# Altium PCB pcb.PCBDOC (part 2 of 4)
Units mil, origin at the board's own origin, x right, y up, seen from the top; angles counter-clockwise.
Board outline 6250 x 3000 mil, 6 copper layers (Top Layer, Internal Plane 1, Mid-Layer 1, Mid-Layer 2, Internal Plane 2, Bottom Layer); 189 components, 357 nets, 1696 pads, 997 vias.
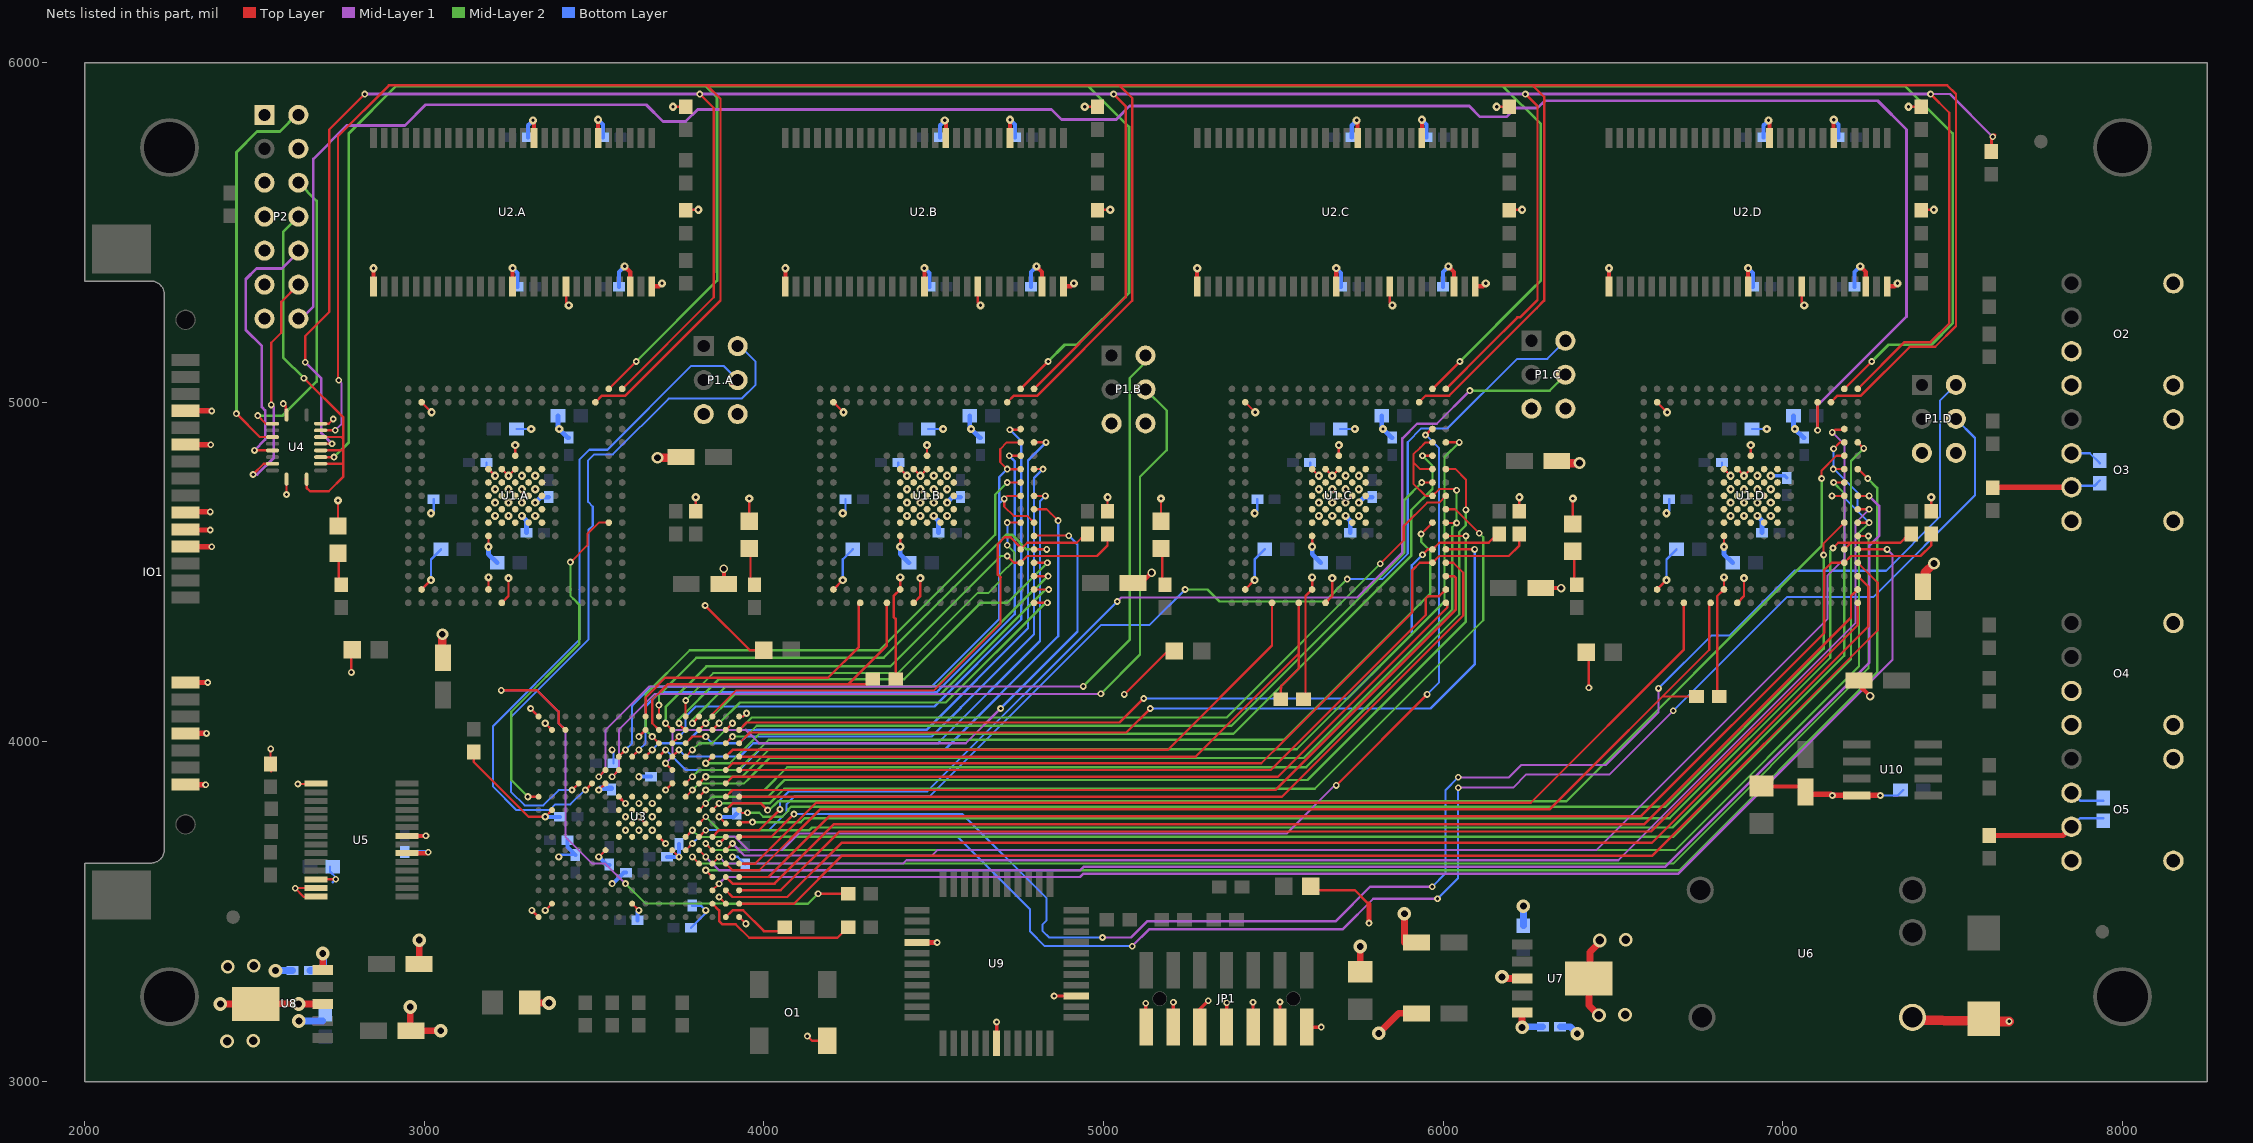
[diagram p6: the nets of this part, all layers, seen from the top]

## Via types
v1: diameter 24, hole 10, Top Layer to Bottom Layer, tented top, 281 vias
v2: diameter 24, hole 10, Top Layer to Bottom Layer, 250 vias
v3: diameter 20, hole 10, Top Layer to Bottom Layer, 211 vias
v4: diameter 21.2, hole 10, Top Layer to Bottom Layer, tented top, 109 vias
v5: diameter 20, hole 10, Top Layer to Bottom Layer, tented top, 96 vias
v6: diameter 40, hole 20, Top Layer to Bottom Layer, 25 vias
v7: diameter 25, hole 15, Top Layer to Bottom Layer, 9 vias
v8: diameter 35, hole 20, Top Layer to Bottom Layer, 8 vias
v9: diameter 40, hole 25, Top Layer to Bottom Layer, 8 vias

## Nets (pads, with @x,y where several pads share a name; then routed paths per layer and width w, separated by ;. In a path a pad name is that pad's centre, name@x,y a point inside that pad or via, vN(x,y) a via of type N, cw(c..) or ccw(c..) an arc to the next point about the centre after c; other vN are vias at no path point) (continued)
DSPA_TFS1: U1.A.G2 U3.G1 | length 1021.1
  Top Layer w6: v5@3428.15,4526.57 3480.32,4578.74 3480.32,4612.2 3513.78,4645.67 U1.A.G2@3543.31,4645.67
  Top Layer w7: v4(3305.12,3838.58) U3.G1@3336.61,3838.58
  Mid-Layer 2 w6: v5(3430.12,4529.53) 3430.12,4430.12 3438.98,4421.26
  Mid-Layer 2 w7: v4(3305.12,3838.58) 3255.91,3887.8 3255.91,4088.58 3456.69,4289.37 3456.69,4403.54 3438.98,4421.26
DSPA_UARTRX: P1.A.4 U3.F5 | length 2019.2
  Top Layer w7: v3(3474.41,3858.27) U3.F5@3494.09,3877.95
  Bottom Layer w6: v3(3474.41,3858.27) 3472.44,3858.27 3430.12,3815.94 3385.83,3815.94 3369.09,3799.21 3271.65,3799.21 3201.77,3869.09 3201.77,4045.28 3456.69,4300.2 3456.69,4830.71 3486.22,4860.24 3539.37,4860.24 3786.42,5107.28 3880.91,5107.28 P1.A.4@3922.83,5065.35
DSPA_UARTTX: P1.A.2 U3.F4 | length 2048.6
  Top Layer w7: v3(3435.04,3858.27) U3.F4@3454.72,3877.95
  Bottom Layer w6: v3(3435.04,3858.27) 3395.67,3858.27 3350.39,3812.99 3295.28,3812.99 3255.91,3852.36 3255.91,4073.82 3483.27,4301.18 3483.27,4624.02 3496.06,4636.81 3496.06,4692.91 3482.28,4706.69 3482.28,4828.74 3500,4846.46 3555.12,4846.46 3719.49,5010.83 3934.06,5010.83 3975.39,5052.17 3975.39,5119.09 P1.A.2@3924.21,5170.28
DSPB_CLK: U1.B.A14 U3.A9 | length 879.5
  Top Layer w7: U3.A9@3651.58,4074.8 3651.57,4129.92 3686.02,4164.37 ; 3685.04,4165.35 3708.66,4188.98 4188.98,4188.98 4279.53,4279.53 U1.B.A14@4279.53,4413.39
DSPB_DR0PRI: U1.B.M2 U3.D8 | length 1869.6
  Top Layer w7: U3.D8@3612.2,3956.69 v4(3631.89,3976.38) ; v5(4722.44,4842.52) U1.B.M2@4755.9,4842.52
  Bottom Layer w6: v4(3631.89,3976.38) 3651.57,3996.06 3651.57,4104.33
  Bottom Layer w7: 3651.57,4104.33 3692.91,4145.67 4507.87,4145.67 4514.75,4152.54 4738.19,4375.98 4738.19,4826.77 v5(4722.44,4842.52)
DSPB_DR1PRI: U1.B.H1 U3.D10 | length 1796.2
  Top Layer w6: U1.B.H1@4795.28,4685.04 4832.68,4685.04 4844.49,4673.23 v5(4866.14,4651.57)
  Top Layer w7: U3.D10@3690.95,3956.69 v4(3710.63,3976.38)
  Bottom Layer w6: v4(3710.63,3976.38) 3769.69,3917.32 3927.17,3917.32
  Bottom Layer w7: 3927.17,3917.32 3986.22,3976.38 4531.5,3976.38 4866.14,4311.02 v5(4866.14,4651.57)
DSPB_DT1PRI: U1.B.F1 U3.E11 | length 1870.5
  Top Layer w6: U1.B.F1@4794.29,4607.28 v3(4897.64,4607.28)
  Top Layer w7: v4(3710.63,3937.01) U3.E11@3730.32,3917.32
  Mid-Layer 1 w6: v4(3710.63,3937.01) 3730.32,3956.69 3730.32,4025.59 3740.16,4035.43 3946.85,4035.43
  Mid-Layer 1 w7: 3946.85,4035.43 3986.22,3996.06 4594.49,3996.06 v3(4696.85,4098.43)
  Bottom Layer w7: v3(4696.85,4098.43) 4923.23,4324.8 4923.23,4581.69 v3(4897.64,4607.28)
DSPB_DTOPRI: U1.B.K2 U3.C10 | length 1592
  Top Layer w7: v4(3671.26,4015.75) U3.C10@3690.95,3996.06 ; v5(4716.53,4763.78) U1.B.K2@4755.9,4763.78
  Mid-Layer 2 w7: v4(3671.26,4015.75) 3651.57,4035.43 3651.57,4139.76 3781.5,4269.69 4340.55,4269.69 4681.1,4610.24 4681.1,4728.35 v5(4716.53,4763.78)
DSPB_FLAG0: U1.B.C1 U3.A13 | length 1307.5
  Top Layer w7: v4(3789.37,4055.12) U3.A13@3809.06,4074.8 ; U1.B.C1@4795.28,4488.19 v5(4836.61,4488.19)
  Mid-Layer 2 w7: v4(3789.37,4055.12) 3789.37,4064.96 3887.8,4163.39 4509.84,4163.39 4795.28,4448.82 4797.24,4448.82 v5(4836.61,4488.19) v5@4830.71,4488.19
DSPB_FLAG1: U1.B.B1 U3.B13 | length 1244.1
  Top Layer w7: U3.B13@3809.06,4035.43 v4(3828.74,4055.12) ; U1.B.B1@4795.28,4448.82 4828.74,4448.82 v5(4838.58,4448.82)
  Mid-Layer 2 w7: v4(3828.74,4055.12) 3913.39,4139.76 4519.69,4139.76 4828.74,4448.82 v5(4838.58,4448.82)
DSPB_FLAG4: U1.B.A1 U3.B14 | length 1180.5
  Top Layer w7: U3.B14@3848.43,4035.43 v4(3868.11,4055.12) ; U1.B.A1@4795.28,4409.45 v5(4834.65,4409.45)
  Mid-Layer 2 w7: v4(3868.11,4055.12) 3929.13,4116.14 4535.43,4116.14 4554.94,4135.65 4808.04,4388.75 4828.74,4409.45 v5(4834.65,4409.45)
DSPB_FS1: U1.B.P2 U3.C11 | length 1806.7
  Top Layer w6: U3.C11@3730.32,3996.06 v5(3750,4015.75)
  Top Layer w7: v5(4724.41,4919.29) 4753.94,4919.29 U1.B.P2@4755.9,4921.26
  Bottom Layer w6: v5(3750,4015.75) 3769.68,4035.43 3769.68,4074.8 3799.21,4104.33 4000,4104.33
  Bottom Layer w7: 4000,4104.33 4501.97,4104.33 4757.87,4360.24 4757.87,4885.83 v5(4724.41,4919.29)
DSPB_MISO: R1.B.1 U1.B.E2 U3.A14 | length 1506
  Top Layer w6: U3.A14@3848.43,4074.8 3848.43,4081.69 3918.31,4151.57 4500.98,4151.57 4696.85,4347.44 4696.85,4486.22
  Top Layer w7: 4696.85,4484.25 4688.98,4492.13 4688.98,4582.68 4708.66,4602.36 4726.38,4602.36 4755.9,4572.84 U1.B.E2@4755.9,4566.93 4775.59,4586.61 4921.26,4586.61 R1.B.1@4944.88,4610.24
DSPB_MOSI: U1.B.E1 U3.A10 | length 1455.8
  Top Layer w7: U3.A10@3690.95,4074.8 v5(3690.94,4108.27) ; U1.B.E1@4795.28,4566.93 v5(4832.68,4566.93)
  Mid-Layer 2 w7: v5(3690.94,4108.27) 3690.94,4137.8 3801.18,4248.03 4352.36,4248.03 4688.41,4584.08 4714.57,4610.24 4730.31,4610.24 4773.62,4566.93 v5(4832.68,4566.93)
DSPB_RESET: R34.B.1 U1.B.A12 U3.B10 | length 1059.1
  Top Layer w7: U3.B10@3690.95,4035.43 3671.26,4055.12 3671.26,4124.02 3716.54,4169.29 4305.12,4169.29 R34.B.1@4320.87,4185.04 ; 4248.03,4169.29 4362.2,4283.46 U1.B.A12@4362.2,4409.45
DSPB_RFS0: U1.B.N1 U3.D9 | length 1887.2
  Top Layer w7: U3.D9@3651.58,3956.69 v4(3671.26,3976.38) ; U1.B.N1@4795.28,4881.89 v5(4830.71,4881.89)
  Bottom Layer w6: v4(3671.26,3976.38) 3690.94,3996.06 3769.68,3996.06 ; 3809.06,4035.43 3978.35,4035.43
  Bottom Layer w7: 3769.68,3996.06 3809.06,4035.43 ; 3978.35,4035.43 4478.35,4035.43 4777.56,4334.65 4777.56,4828.74 v5(4830.71,4881.89)
DSPB_RFS1: U1.B.J1 U3.D11 | length 1707.2
  Top Layer w6: U1.B.J1@4795.28,4724.41 v5(4828.74,4724.41)
  Top Layer w7: U3.D11@3730.32,3956.69 v4(3750,3976.38)
  Bottom Layer w6: v4(3750,3976.38) 3769.69,3956.69 3929.13,3956.69
  Bottom Layer w7: 3929.13,3956.69 3968.5,3996.06 4511.81,3996.06 4812.99,4297.24 4812.99,4708.66 v5(4828.74,4724.41)
DSPB_SCK: U1.B.D1 U3.B12 | length 1357.2
  Top Layer w7: v4@3748.03,4055.12 3767.72,4035.43 U3.B12@3769.69,4035.43 ; U1.B.D1@4795.28,4527.56 v5(4834.65,4527.56)
  Mid-Layer 2 w7: v4@3748.03,4055.12 3748.03,4064.96 3868.11,4185.04 4413.39,4185.04 4637.8,4409.45 4716.54,4409.45 v5(4834.65,4527.56)
  other v4: 3750,4055.12
DSPB_SCLK: U1.B.G1 U1.B.J2 U1.B.L2 U1.B.N2 U3.D7 | length 2181.1
  Top Layer w6: v5(4716.53,4803.15) 4695.87,4823.82 4695.87,4862.2 4715.55,4881.89 U1.B.N2@4755.9,4881.89 ; U1.B.J2@4755.9,4724.41 4716.53,4724.41 v5(4707.68,4715.55) 4707.68,4692.91 4735.24,4665.35 4775.59,4665.35 U1.B.G1@4795.28,4645.67
  Top Layer w7: U3.D7@3572.83,3956.69 v4(3592.52,3976.38) ; v5(4716.53,4803.15) U1.B.L2@4755.9,4803.15
  Bottom Layer w6: v4(3592.52,3976.38) 3612.2,3996.06 3612.2,4106.3 ; 4692.91,4700.79 v5(4707.68,4715.55)
  Bottom Layer w7: 3612.2,4106.3 3668.22,4162.31 4493.02,4162.31 4692.91,4362.2 4692.91,4779.53 v5(4716.53,4803.15)
DSPB_SS: R7.B.2 U1.B.D2 U3.B11 | length 1623.4
  Top Layer w7: v4(3710.63,4055.12) U3.B11@3730.32,4035.43 ; v5(4716.54,4547.24) 4736.22,4527.56 U1.B.D2@4755.9,4527.56 4775.59,4547.24 4980.32,4547.24 5011.81,4578.74 R7.B.2@5011.81,4612.2
  Mid-Layer 2 w6: 4688.98,4539.37 4696.85,4547.24 v5(4716.54,4547.24)
  Mid-Layer 2 w7: v4(3710.63,4055.12) 3710.63,4102.36 3830.71,4222.44 4372.05,4222.44 4688.98,4539.37
DSPB_TFS0: U1.B.L1 U3.C12 | length 1714.3
  Top Layer w6: U1.B.L1@4795.28,4803.15 v5(4821.85,4803.15)
  Top Layer w7: U3.C12@3769.69,3996.06 3789.37,4015.75 v4(3828.74,4015.75)
  Bottom Layer w6: v4(3828.74,4015.75) 3848.43,3996.06 3927.17,3996.06
  Bottom Layer w7: 3927.17,3996.06 3946.85,4015.75 4494.09,4015.75 4579.9,4101.56 ; 4568.81,4090.47 4795.28,4316.93 4795.28,4776.57 v5(4821.85,4803.15)
DSPB_TFS1: U1.B.G2 U3.A12 | length 1357.1
  Top Layer w6: U3.A12@3769.69,4074.8 v3(3769.69,4122.05) ; v5(4716.54,4645.67) U1.B.G2@4755.9,4645.67
  Mid-Layer 2 w6: v3(3769.69,4122.05) 3850.39,4202.76 4393.7,4202.76 4629.92,4438.98 4661.42,4438.98 4694.88,4472.44 4694.88,4492.13 4738.15,4535.4 4738.15,4557.12 v5(4716.54,4578.74)
  Bottom Layer w6: v5(4716.54,4578.74) v5(4716.54,4645.67)
DSPB_UARTRX: P1.B.4 U3.E7 | length 2639.3
  Top Layer w6: v3(3553.15,3897.64) U3.E7@3572.83,3917.32
  Mid-Layer 1 w6: v3(3553.15,3897.64) 3572.83,3917.32 3572.83,4035.43 3679.13,4141.73 v3(4992.13,4141.73)
  Mid-Layer 2 w7: v3(4992.13,4141.73) 5107.28,4256.89 5107.28,4780.51 5186.02,4859.25 5186.02,4975.39 P1.B.4@5123.62,5037.8
DSPB_UARTTX: P1.B.2 U3.E6 | length 2683.2
  Top Layer w6: v3(3513.78,3897.64) U3.E6@3533.46,3917.32
  Mid-Layer 1 w6: v3(3513.78,3897.64) 3533.46,3917.32 3533.46,4034.45 3662.4,4163.39 v3(4939.96,4163.39)
  Mid-Layer 2 w7: v3(4939.96,4163.39) 5076.77,4300.2 5076.77,5070.87 5123.62,5117.72 P1.B.2@5123.62,5137.8
DSPC_CLK: U1.C.A14 U3.D15 | length 1869
  Top Layer w7: U3.D15@3887.8,3956.69 3907.48,3976.38 5188.98,3976.38 5496.06,4283.46 U1.C.A14@5496.06,4407.48 ; U1.C.A14@5495.08,4408.46 U1.C.A14@5496.06,4409.45
DSPC_DR0PRI: U1.C.M2 U3.D14 | length 2724.4
  Top Layer w7: v4@3826.77,3937.01 v4(3828.74,3937.01) U3.D14@3848.43,3956.69 ; v5(5938.98,4842.52) U1.C.M2@5968.5,4842.52
  Mid-Layer 2 w7: v4@3826.77,3937.01 3899.61,3937.01 3986.22,4023.62 5381.89,4023.62 5905.51,4547.24 5905.51,4682.09 5968.5,4745.08 5968.5,4812.99 v5(5938.98,4842.52)
DSPC_DR1PRI: U1.C.H1 U3.H14 | length 2889.8
  Top Layer w6: U3.H14@3848.43,3799.21 v5(3868.11,3818.9) ; U1.C.H1@6007.87,4685.04 6035.43,4685.04 v3(6106.3,4614.17)
  Mid-Layer 2 w7: v5(3868.11,3818.9) 4016.73,3818.9 4060.04,3862.2 5622.05,3862.2 6118.11,4358.27 6118.11,4602.36 v3(6106.3,4614.17)
DSPC_DT1PRI: U1.C.F1 U3.H13 | length 2804.4
  Top Layer w6: U3.H13@3809.06,3799.21 v5(3828.74,3818.9) ; U1.C.F1@6007.87,4606.3 v5(6066.93,4606.3)
  Mid-Layer 1 w6: v5(6066.93,4606.3) v5@6070.87,4610.24
  Mid-Layer 2 w6: v5(3828.74,3818.9) 3848.43,3838.58 4011.81,3838.58
  Mid-Layer 2 w7: 4011.81,3838.58 4061.02,3887.8 5600.39,3887.8 6066.93,4354.33 v5(6066.93,4606.3)
DSPC_DTOPRI: U1.C.K2 U3.C15 | length 2489.8
  Top Layer w7: U3.C15@3887.8,3996.06 v4(3907.48,4015.75) ; v5(5937.01,4763.78) U1.C.K2@5968.5,4763.78
  Mid-Layer 2 w6: v4(3907.48,4015.75) 3946.85,4015.75 3978.35,4047.24
  Mid-Layer 2 w7: 3978.35,4047.24 5375.98,4047.24 5885.83,4557.09 5885.83,4712.6 v5(5937.01,4763.78)
DSPC_FLAG0: U1.C.C1 U3.G15 | length 2502.4
  Top Layer w7: U3.G15@3887.8,3838.58 3907.48,3858.27 5505.91,3858.27 6037.4,4389.76 6037.4,4482.28 6031.5,4488.19 U1.C.C1@6007.87,4488.19
DSPC_FLAG1: U1.C.B1 U3.E16 | length 2328.5
  Top Layer w7: U3.E16@3927.17,3917.32 5492.13,3917.32 5948.82,4374.02 5948.82,4421.26 5956.69,4429.13 5988.19,4429.13 U1.C.B1@6007.87,4448.82
DSPC_FLAG4: U1.C.A1 U3.F15 | length 2353.9
  Top Layer w7: U3.F15@3887.8,3877.95 3907.48,3897.64 5513.78,3897.64 6011.81,4395.67 6011.81,4405.51 U1.C.A1@6007.87,4409.45
DSPC_FS1: U1.C.P2 U3.K15 | length 3151.8
  Top Layer w7: v5(3868.11,3700.79) U3.K15@3887.8,3720.47 ; v3(5685.04,3872.05) v3(5952.76,4139.76) ; v3(5947.83,4903.54) 5965.55,4921.26 U1.C.P2@5969.49,4921.26
  Mid-Layer 1 w6: v5(3868.11,3700.79) 3888.3,3720.98 3914.84,3720.98 3954.72,3681.1 4053.15,3681.1 4102.36,3730.32 5539.37,3730.32 5681.1,3872.05 v3(5685.04,3872.05)
  Bottom Layer w6: v3@5948.33,4904.03 5988.19,4864.17 5988.19,4175.2 v3(5952.76,4139.76)
DSPC_MISO: R1.C.1 U1.C.E2 U3.B16 | length 2587.2
  Top Layer w7: U3.B16@3927.17,4035.43 3948.82,4057.09 5047.24,4057.09 v3(5118.11,4127.95) ; v5(5938.98,4551.18) 5954.72,4566.93 U1.C.E2@5968.5,4566.93 5988.19,4586.61 6133.86,4586.61 R1.C.1@6157.48,4610.24
  Bottom Layer w7: v3(5118.11,4127.95) 5718.5,4127.95 5907.48,4316.93 5907.48,4519.69 v5(5938.98,4551.18)
DSPC_MOSI: U1.C.E1 U3.C16 | length 2686.8
  Top Layer w7: U3.C16@3927.17,3996.06 3958.66,4027.56 5066.93,4027.56 v3(5137.8,4098.43) ; U1.C.E1@6005.91,4566.93 v3(6092.52,4566.93)
  Bottom Layer w7: v3(5137.8,4098.43) 5962.6,4098.43 6092.52,4228.35 v3(6092.52,4566.93)
DSPC_RESET: R34.C.1 U1.C.A12 U3.D16 | length 2078.7
  Top Layer w7: U3.D16@3927.17,3956.69 5271.65,3956.69 5574.8,4259.84 ; R34.C.1@5521.65,4125.98 5521.65,4157.48 5523.62,4159.45 5523.62,4165.35 5574.8,4216.53 U1.C.A12@5574.8,4409.45
DSPC_RFS0: U1.C.N1 U3.F13 | length 2942.5
  Top Layer w7: U3.F13@3809.06,3877.95 v4(3828.74,3897.64) ; U1.C.N1@6007.87,4881.89 v5(6047.24,4881.89)
  Mid-Layer 2 w7: v4(3828.74,3897.64) 3935.04,3897.64 4015.75,3978.35 5568.9,3978.35 6003.94,4413.39 6003.94,4838.58 v5(6047.24,4881.89)
DSPC_RFS1: U1.C.J1 U3.D12 | length 2581
  Top Layer w6: U3.D12@3769.69,3956.69 v5(3789.37,3976.38) ; v5(5814.96,4524.61) 5883.86,4593.5 5883.86,4635.83 5952.76,4704.72 5988.19,4704.72 U1.C.J1@6007.87,4724.41
  Mid-Layer 2 w6: v5(3789.37,3976.38) 3809.05,3996.06 3848.43,3996.06 3887.8,4035.43 3928.15,4035.43 3964.57,4071.85 5362.2,4071.85 v5(5814.96,4524.61)
DSPC_SCK: U1.C.D1 U3.G16 | length 2542.3
  Top Layer w7: U3.G16@3927.17,3838.58 5525.59,3838.58 6059.06,4372.05 6059.06,4498.03 6029.53,4527.56 U1.C.D1@6007.87,4527.56
DSPC_SCLK: U1.C.G1 U1.C.J2 U1.C.L2 U1.C.N2 U3.G12 | length 3246.4
  Top Layer w6: U3.G12@3769.69,3838.58 v5(3789.37,3858.27) ; 5912.4,4823.82 5933.07,4803.15 U1.C.L2@5968.5,4803.15 ; U1.C.N2@5968.5,4881.89 5947.83,4881.89 5932.09,4866.14 5912.4,4846.46 5912.4,4759.84 5947.84,4724.41 U1.C.J2@5968.5,4724.41 5988.19,4744.09 6036.42,4744.09 v5(6039.37,4741.14) ; U1.C.G1@6007.87,4644.69 v5(6039.37,4644.69)
  Mid-Layer 2 w6: v5(3789.37,3858.27) 3809.05,3877.95 3941.93,3877.95 3954.84,3890.86 ; v5(6039.37,4644.69) v5(6039.37,4741.14)
  Mid-Layer 2 w7: 3954.84,3890.86 4016.73,3952.76 5589.57,3952.76 6026.57,4389.76 6026.57,4631.89 v5(6039.37,4644.69)
DSPC_SS: R7.C.2 U1.C.D2 U3.E15 | length 2716.7
  Top Layer w7: U3.E15@3887.8,3917.32 3907.48,3937.01 5464.57,3937.01 5529.53,4001.97 5909.45,4381.89 5909.45,4505.91 5931.1,4527.56 U1.C.D2@5968.5,4527.56 5988.19,4547.24 6192.91,4547.24 6224.41,4578.74 R7.C.2@6224.41,4612.2
DSPC_TFS0: U1.C.L1 U3.G13 | length 2937.3
  Top Layer w6: U1.C.L1@6007.87,4803.15 6036.42,4803.15 6066.93,4772.64 v5(6066.93,4683.07)
  Top Layer w7: U3.G13@3809.06,3838.58 v4(3828.74,3858.27)
  Mid-Layer 2 w7: v4(3828.74,3858.27) 4001.97,3858.27 4068.9,3925.2 5596.46,3925.2 5641.33,3970.07 6047.24,4375.98 6047.24,4618.11 6066.93,4637.8 v5(6066.93,4683.07)
DSPC_TFS1: U1.C.G2 U3.F12 | length 2657.6
  Top Layer w6: U3.F12@3769.69,3877.95 v5(3789.37,3897.64) ; v5(5935.04,4612.2) U1.C.G2@5968.5,4645.67
  Mid-Layer 2 w6: v5(3789.37,3897.64) 3809.06,3917.32 3924.21,3917.32 4013.78,4006.89
  Mid-Layer 2 w7: 4013.78,4006.89 5532.48,4006.89 5961.61,4436.02 5961.61,4562.99 5935.04,4589.57 v5(5935.04,4612.2)
DSPC_UARTRX: P1.C.4 U3.K14 | length 3287.6
  Top Layer w7: U3.K14@3848.43,3720.47 3868.11,3740.16 3986.22,3740.16 v3(4047.24,3801.18)
  Mid-Layer 1 w7: v3(5040.35,4413.39) 5052.17,4425.2 5747.05,4425.2 5879.92,4558.07 5879.92,4893.7 5923.23,4937.01 5981.3,4937.01 v3(6078.74,5034.45)
  Mid-Layer 2 w7: v3(6078.74,5034.45) 6313.98,5034.45 6359.84,5080.31 P1.C.4@6359.84,5081.1
  Bottom Layer w6: v3(4047.24,3801.18) 4047.24,3827.76 4073.82,3854.33 4481.3,3854.33 v3(5040.35,4413.39)
DSPC_UARTTX: P1.C.2 U3.K13 | length 3392.1
  Top Layer w7: U3.K13@3809.06,3720.47 v3(3828.74,3740.16) ; v3(5240.16,4448.82) v3@5241.14,4448.82
  Mid-Layer 2 w7: v3@5241.14,4448.82 5306.1,4448.82 5341.54,4413.39 5651.57,4413.39 v3(5717.52,4479.33)
  Bottom Layer w6: v3(3828.74,3740.16) 4014.76,3740.16 4066.93,3792.32 4066.93,3816.93 4088.58,3838.58 4487.2,3838.58 4993.11,4344.49 5135.83,4344.49 v3(5240.16,4448.82) ; v3(5717.52,4479.33) 5820.87,4479.33 5895.67,4554.13 5895.67,4882.87 5936.02,4923.23 6012.8,4923.23 6217.52,5127.95 6306.69,5127.95 P1.C.2@6359.84,5181.1
DSPD_CLK: U1.D.A14 U3.M16 | length 3180.2
  Top Layer w7: U3.M16@3927.17,3641.73 3974.41,3641.73 4153.54,3820.87 6257.87,3820.87 6708.66,4271.65 U1.D.A14@6708.66,4409.45
DSPD_DR0PRI: U1.D.M2 U3.H15 | length 3877.8
  Top Layer w6: v5(7114.17,4775.59) 7114.17,4799.21 7157.48,4842.52 U1.D.M2@7181.1,4842.52
  Top Layer w7: U3.H15@3887.8,3799.21 3907.48,3818.9 3991.14,3818.9 v3(4010.83,3799.21)
  Mid-Layer 2 w7: v3@4007.87,3799.21 4015.75,3799.21 4041.34,3824.8 6362.2,3824.8 7114.17,4576.77 v5(7114.17,4775.59) ; v3(4010.83,3799.21) v3@4012.8,3801.18
DSPD_DR1PRI: U1.D.H1 U3.M14 | length 4060.4
  Top Layer w6: U3.M14@3848.43,3641.73 v5(3868.11,3661.42) ; U1.D.H1@7220.47,4685.04 v5(7253.94,4685.04)
  Mid-Layer 1 w6: v5(3868.11,3661.42) 3887.8,3641.73 4409.45,3641.73 4419.29,3651.57 6515.75,3651.57 7214.57,4350.39 7214.57,4645.67 v5(7253.94,4685.04)
DSPD_DT1PRI: U1.D.F1 U3.M13 | length 4157.9
  Top Layer w6: v5(3789.37,3661.42) U3.M13@3809.06,3641.73
  Top Layer w7: U1.D.F1@7220.47,4606.3 v5(7251.97,4606.3)
  Mid-Layer 2 w6: v5(3789.37,3661.42) 3809.05,3641.73 6677.17,3641.73 7251.97,4216.53 v5(7251.97,4606.3)
DSPD_DTOPRI: U1.D.K2 U3.J13 | length 4163.7
  Top Layer w6: v5(7149.61,4763.78) U1.D.K2@7181.1,4763.78
  Top Layer w7: U3.J13@3809.06,3759.84 v3(3828.74,3779.53)
  Mid-Layer 2 w7: v3(3828.74,3779.53) 3868.11,3740.16 4133.86,3740.16 4141.73,3748.03 6675.2,3748.03 7181.1,4253.94 7181.1,4732.28 v5(7149.61,4763.78)
DSPD_FLAG0: U1.D.C1 U3.P15 | length 3863.2
  Top Layer w7: U3.P15@3887.8,3562.99 3907.48,3543.31 4068.9,3543.31 4228.35,3702.76 6614.17,3702.76 7251.97,4340.55 7251.97,4456.69 U1.D.C1@7220.47,4488.19
DSPD_FLAG1: U1.D.B1 U3.N15 | length 3736.5
  Top Layer w7: U3.N15@3887.8,3602.36 3907.48,3582.68 4031.5,3582.68 4206.69,3757.87 6592.52,3757.87 7200.79,4366.14 7200.79,4429.13 U1.D.B1@7220.47,4448.82
DSPD_FLAG4: U1.D.A1 U3.P16 | length 3682
  Top Layer w7: U3.P16@3927.17,3562.99 4049.21,3562.99 4222.44,3736.22 6612.2,3736.22 7220.47,4344.49 U1.D.A1@7220.47,4409.45
DSPD_FS1: U1.D.P2 U3.L15 | length 4178.5
  Top Layer w7: U3.L15@3887.8,3681.1 v5(3907.48,3700.79) ; v5(7145.67,4911.42) 7153.54,4919.29 U1.D.P2@7181.1,4919.29
  Mid-Layer 1 w6: v5(3907.48,3700.79) 3942.91,3665.35 4494.09,3665.35 4509.84,3681.1 6450.79,3681.1 7131.89,4362.2 7131.89,4490.16 7181.1,4539.37 7181.1,4875.98 v5(7145.67,4911.42)
DSPD_MISO: R1.D.1 U1.D.E2 U3.J16 | length 4007.5
  Top Layer w7: U3.J16@3927.17,3759.84 3931.1,3763.78 v5(3966.54,3763.78) ; v5(7147.64,4570.87) 7163.39,4586.61 7346.46,4586.61 R1.D.1@7370.08,4610.24 ; U1.D.E2@7181.1,4566.93 7200.79,4586.61
  Mid-Layer 2 w7: v5(3966.54,3763.78) 4108.27,3763.78 4120.08,3775.59 6667.32,3775.59 7139.76,4248.03 7139.76,4562.99 v5(7147.64,4570.87)
DSPD_MOSI: U1.D.E1 U3.P14 | length 4173.7
  Top Layer w6: U3.P14@3848.43,3562.99 v5(3868.11,3582.68)
  Top Layer w7: U1.D.E1@7220.47,4566.93 v3(7307.09,4566.93)
  Mid-Layer 1 w7: v5(3868.11,3582.68) 3887.8,3602.36 4931.1,3602.36 4940.94,3612.2 6692.91,3612.2 7322.83,4242.13 7322.83,4551.18 v3(7307.09,4566.93)
DSPD_RESET: R34.D.1 U1.D.A12 U3.M15 | length 3412.7
  Top Layer w7: U3.M15@3887.8,3641.73 3907.48,3622.05 3986.22,3622.05 4165.35,3801.18 6312.99,3801.18 6783.28,4271.47 6783.28,4405.33 U1.D.A12@6787.4,4409.45 ; 6645.67,4133.86 R34.D.1@6746.06,4133.86
DSPD_RFS0: U1.D.N1 U3.K12 | length 4324.9
  Top Layer w7: U3.K12@3769.69,3720.47 v4(3789.37,3740.16) ; U1.D.N1@7220.47,4881.89 v5(7238.19,4864.17)
  Mid-Layer 2 w6: v4(3789.37,3740.16) 3809.06,3720.47 4049.21,3720.47
  Mid-Layer 2 w7: 4049.21,3720.47 6677.17,3720.47 7200.79,4244.09 7200.79,4826.77 v5(7238.19,4864.17)
DSPD_RFS1: U1.D.J1 U3.L13 | length 4272.2
  Top Layer w6: U3.L13@3809.06,3681.1 v5(3828.74,3661.42) ; U1.D.J1@7220.47,4724.41 v5(7253.94,4724.41)
  Mid-Layer 1 w7: v5(3828.74,3661.42) 3868.11,3622.05 4931.1,3622.05 4940.94,3631.89 6653.54,3631.89 7253.94,4232.28 7253.94,4576.77 7283.46,4606.3 7283.46,4694.88 v5(7253.94,4724.41)
DSPD_SCK: U1.D.D1 U3.R16 | length 3909.1
  Top Layer w7: U3.R16@3927.17,3523.62 4088.58,3523.62 4230.31,3665.35 6616.14,3665.35 7279.53,4328.74 7279.53,4468.5 U1.D.D1@7220.47,4527.56
DSPD_SCLK: U1.D.G1 U1.D.J2 U1.D.L2 U1.D.N2 U3.L14 | length 4592.2
  Top Layer w6: v5(3828.74,3700.79) U3.L14@3848.43,3681.1 ; v5(7144.69,4724.41) U1.D.J2@7181.1,4724.41 ; v5(7148.62,4803.15) U1.D.L2@7181.1,4803.15 ; v5(7149.61,4863.19) 7168.31,4881.89 U1.D.N2@7181.1,4881.89 U1.D.N2@7185.04,4881.89
  Top Layer w7: U1.D.G1@7220.47,4645.67 v5(7253.94,4645.67)
  Mid-Layer 2 w6: v5(3828.74,3700.79) 3848.43,3681.1 6683.07,3681.1 7224.41,4222.44 7224.41,4616.14 v5(7253.94,4645.67)
  Bottom Layer w6: v5(7144.69,4724.41) 7175.2,4724.41 v5(7253.94,4645.67) ; v5(7149.61,4863.19) 7149.61,4804.13 7220.47,4733.27 7220.47,4679.13
DSPD_SS: R7.D.2 U1.D.D2 U3.N16 | length 4056.1
  Top Layer w7: U3.N16@3927.17,3602.36 4013.78,3602.36 4192.91,3781.5 6582.68,3781.5 7122.05,4320.87 7122.05,4505.91 7143.7,4527.56 U1.D.D2@7181.1,4527.56 7200.79,4547.24 7405.51,4547.24 7437.01,4578.74 R7.D.2@7437.01,4612.2
DSPD_TFS0: U1.D.L1 U3.N14 | length 4342.1
  Top Layer w6: v4(3828.74,3622.05) U3.N14@3848.43,3602.36
  Top Layer w7: U1.D.L1@7220.47,4805.12 v5(7250,4775.59)
  Mid-Layer 2 w7: v4(3828.74,3622.05) 6694.88,3622.05 7277.56,4204.72 7277.56,4748.03 v5(7250,4775.59)
DSPD_TFS1: U1.D.G2 U3.H16 | length 3804.7
  Top Layer w6: U3.H16@3927.17,3799.21 3935.04,3791.34 v3(3951.77,3791.34) ; v5(7120.08,4550.2) 7120.08,4584.65 U1.D.G2@7181.1,4645.67
  Mid-Layer 2 w7: v3(3951.77,3791.34) 3986.22,3791.34 3998.03,3779.53 4053.96,3779.53 4071.85,3797.42 4071.85,3801.18 4079.72,3809.06 6654.53,3809.06 7120.08,4274.61 v5(7120.08,4550.2)
DSPD_UARTRX: P1.D.4 U3.L12 | length 4937.8
  Top Layer w7: U3.L12@3769.69,3681.1 v3(3789.37,3700.79)
  Mid-Layer 1 w6: v3(6044.29,3865.16) 6205.71,3865.16 6245.08,3904.53 6490.16,3904.53 v3(6677.17,4091.54)
  Mid-Layer 1 w7: v3(5084.65,3398.62) 5134.84,3448.82 5704.72,3448.82 5794.29,3538.39 v3(5983.27,3538.39)
  Bottom Layer w6: v3(3789.37,3700.79) 3809.06,3720.47 4569.88,3720.47 4783.46,3506.89 4783.46,3441.93 4826.77,3398.62 v3(5084.65,3398.62) ; v3(5983.27,3538.39) 6044.29,3599.41 v3(6044.29,3865.16) ; v3(6677.17,4091.54) 7011.81,4426.18 7265.75,4426.18 7565.94,4726.38 7565.94,4894.69 P1.D.4@7509.45,4951.18
DSPD_UARTTX: P1.D.2 U3.K16 | length 4892.4
  Top Layer w7: U3.K16@3927.17,3720.47 4021.65,3720.47 v3(4088.58,3787.4)
  Mid-Layer 1 w6: v3(6044.29,3895.67) 6193.9,3895.67 6230.31,3932.09 6478.35,3932.09 6633.86,4087.6 v3(6633.86,4157.48)
  Mid-Layer 1 w7: v3(4997.05,3424.21) 5080.71,3424.21 5128.94,3472.44 5684.06,3472.44 5785.43,3573.82 v3(5967.52,3573.82)
  Bottom Layer w6: v3(4088.58,3787.4) 4584.65,3787.4 4832.68,3539.37 4832.68,3474.41 4820.87,3462.6 4820.87,3442.91 4839.57,3424.21 v3(4997.05,3424.21) ; v3(5967.52,3573.82) 6006.89,3613.19 6006.89,3858.27 v3(6044.29,3895.67) ; v3(6633.86,4157.48) 6790.35,4313.98 6844.49,4313.98 7034.45,4503.94 7304.13,4503.94 7462.6,4662.4 7462.6,5004.33 P1.D.2@7509.45,5051.18
DSPE\M\U\: P2.2 U4.4 | length 1132.9
  Top Layer w7: v3(2446.85,4966.54) 2515.75,4897.64 U4.4@2553.15,4897.64
  Mid-Layer 2 w8: v3(2446.85,4966.54) 2446.85,5736.22 2507.87,5797.24 2574.8,5797.24 2624.02,5846.46 P2.2@2629.53,5846.46
DSPE\M\U\BUF: R35.1 U1.A.U1 U1.B.U1 U1.C.U1 U1.D.U1 U4.16 | length 10130.6
  Top Layer w7: v3(2649.43,5117.94) 2649.43,5194.71 2720.47,5265.75 2720.47,5803.15 v3(2824.8,5907.48) ; U4.16@2694.88,4877.95 v3(2728.35,4877.95) ; U1.A.U1@3582.68,5039.37 3852.36,5309.06 3852.36,5866.14 v3(3811.02,5907.48) ; U1.B.U1@4795.28,5039.37 5064.96,5309.06 5064.96,5872.05 v3(5029.53,5907.48) ; U1.C.U1@6007.87,5039.37 6134.18,5165.68 6218.5,5250 6226.38,5250 6277.56,5301.18 6277.56,5872.05 v3(6242.13,5907.48) ; U1.D.U1@7220.47,5039.37 7358.27,5177.17 7435.04,5177.17 7490.16,5232.28 7490.16,5852.36 v3(7435.04,5907.48)
  Top Layer w9: R35.1@7614.17,5738.19 7614.17,5777.56 v3@7624.02,5787.4
  Mid-Layer 1 w6: 2710.46,4895.84 v3(2728.35,4877.95)
  Mid-Layer 1 w7: v3(7435.04,5907.48) 7492.13,5907.48 v3(7618.11,5781.5)
  Mid-Layer 1 w8: v3(2649.43,5117.94) 2696.85,5070.52 2696.85,4909.45 v3(2728.35,4877.95) ; v3(2824.8,5907.48) v3(7435.04,5907.48)
DSPT\R\S\T\: P2.10 U4.6 | length 790.9
  Top Layer w7: v3(2500,4858.27) U4.6@2555.12,4858.27
  Mid-Layer 1 w8: v3@2498.03,4860.24 v3(2500,4858.27) 2531.5,4889.76 2531.5,4976.38 2521.65,4986.22 2521.65,5165.35 2474.41,5212.6 2474.41,5362.2 2505.91,5393.7 2580.71,5393.7 2629.53,5442.52 P2.10@2629.53,5446.46
DSPT\R\S\T\BUF: U1.A.U2 U1.B.U2 U1.C.U2 U1.D.U2 U4.14 | length 10007.1
  Top Layer w7: U4.14@2696.85,4838.58 v3(2734.25,4838.58) ; U1.A.U2@3543.31,5039.37 v3(3624.02,5120.08) ; U1.B.U2@4755.9,5039.37 v3(4836.61,5120.08) ; U1.C.U2@5968.5,5039.37 v3(6049.21,5120.08) ; U1.D.U2@7181.1,5039.37 v5(7261.81,5120.08)
  Mid-Layer 2 w7: v3(3624.02,5120.08) 3862.2,5358.27 3862.2,5382.87
  Mid-Layer 2 w8: v3(2734.25,4838.58) 2777.56,4881.89 2777.56,5791.34 2917.32,5931.1 7360.24,5931.1 7500,5791.34 7500,5232.28 7437.01,5169.29 7311.02,5169.29 v5(7261.81,5120.08) ; 3828.74,5931.1 3862.2,5897.64 3862.2,5382.87 ; v3(4836.61,5120.08) 4885.83,5169.29 4922.24,5169.29 5074.8,5321.85 5074.8,5811.02 4954.72,5931.1 ; v3(6049.21,5120.08) 6260.83,5331.69 6287.4,5358.27 6287.4,5818.9 6175.2,5931.1
DSPTCK: P2.8 U4.11 U4.13 U4.15 U4.17 | length 1216.9
  Top Layer w7: v3(2645.67,5070.87) 2761.81,4954.72 2761.81,4781.5 2718.5,4738.19 2663.39,4738.19 2653.54,4748.03 U4.11@2653.54,4773.62 ; U4.11@2651.57,4773.62 U4.11@2653.54,4771.65 ; U4.13@2694.88,4818.9 2759.84,4818.9 ; U4.15@2694.88,4858.27 2761.81,4858.27 ; U4.17@2694.88,4897.64 2755.91,4897.64 2761.81,4891.73
  Mid-Layer 2 w8: P2.8@2629.53,5546.46 2584.65,5501.57 2584.65,5131.89 v3(2645.67,5070.87)
DSPTDI: P2.12 U4.8 | length 697.9
  Top Layer w7: v3(2496.06,4787.4) 2527.56,4818.9 U4.8@2553.15,4818.9 ; v3(2549.21,4992.13) 2549.21,5175.2 2578.74,5204.72 2578.74,5295.67 P2.12@2629.53,5346.46
  Mid-Layer 1 w8: v3(2496.06,4787.4) 2507.87,4787.4 2557.09,4836.61 2557.09,4984.25 v3(2549.21,4992.13)
DSPTDO: P2.14 U1.D.T4 | length 6457.9
  Top Layer w7: v5(7102.36,4917.32) U1.D.T4@7102.36,5000
  Mid-Layer 1 w8: P2.14@2629.53,5246.46 P2.14@2631.5,5246.46 ; P2.14@2633.86,5242.13 2673.23,5281.5 2673.23,5716.54 2771.65,5814.96 2942.91,5814.96 3003.94,5875.98 3653.54,5875.98 3702.76,5826.77 3769.69,5826.77 3805.12,5862.2 4846.46,5862.2 4875.98,5832.68 5037.4,5832.68 5076.77,5872.05 6076.77,5872.05 6108.27,5840.55 6187.01,5840.55 6212.6,5866.14 6277.56,5866.14 6299.21,5887.8 7279.53,5887.8 7364.17,5803.15 7364.17,5251.97 7102.36,4990.16 v5(7102.36,4917.32)
DSPTMS: P2.6 U4.2 | length 875.5
  Top Layer w7: v3(2509.84,4960.63) 2533.46,4937.01 U4.2@2553.15,4937.01
  Mid-Layer 2 w8: v3(2509.84,4960.63) 2582.68,4960.63 2683.07,5061.02 2683.07,5592.91 P2.6@2629.53,5646.46
DSPTMSBUF: U1.A.T3 U1.B.T3 U1.C.T3 U1.D.T3 U4.18 | length 10321.9
  Top Layer w7: U4.18@2694.88,4917.32 v3(2738.19,4917.32) ; v3@2746.06,5066.93 2746.06,5783.46 2895.67,5933.07 7484.25,5933.07 7509.84,5907.48 7509.84,5224.41 7448.82,5163.39 7374.02,5163.39 7230.31,5019.69 7161.42,5019.69 U1.D.T3@7141.73,5000 ; U1.A.T3@3503.94,5000 3523.62,5019.69 3592.52,5019.69 3872.05,5299.21 3872.05,5893.7 3832.68,5933.07 ; U1.B.T3@4716.53,5000 4736.22,5019.69 4805.12,5019.69 5084.65,5299.21 5084.65,5895.67 5047.24,5933.07 ; U1.C.T3@5929.13,5000 5948.82,5019.68 6017.72,5019.68 6275.32,5277.29 6297.24,5299.21 6297.24,5899.61 6263.78,5933.07
  Mid-Layer 1 w6: v3(2738.19,4917.32) 2755.91,4935.04 2755.91,5057.09 v3(2748.03,5064.96)
FCLK: R30.2 U3.T15 | length 211.6
  Top Layer w7: U3.T15@3887.8,3484.25 3907.48,3503.94 3938.98,3503.94 4000,3442.91 4049.21,3442.91 R30.2@4061.02,3454.72
FDONE: R31.2 U3.R14 | length 473.8
  Top Layer w7: U3.R14@3848.43,3523.62 3868.11,3503.94 3868.11,3472.44 3877.95,3462.6 3917.32,3462.6 3956.69,3423.23 4216.54,3423.23 4246.06,3452.76 R31.2@4242.13,3452.76
FPROG: R32.2 U3.B3 | length 1754.8
  Top Layer w7: v3(3226.38,4151.57) 3332.68,4151.57 3395.67,4088.58 3395.67,4055.12 U3.B3@3415.35,4035.43 ; v3(4159.45,3553.15) R32.2@4248.03,3553.15
  Mid-Layer 1 w6: 3415.35,4035.43 3415.35,3720.47 3494.09,3641.73 3533.46,3641.73 v4(3592.52,3582.68)
  Mid-Layer 1 w7: v3(3226.38,4151.57) 3332.68,4151.57 3395.67,4088.58 3395.67,4055.12 3415.35,4035.43
  Mid-Layer 2 w6: v4(3592.52,3582.68) 3651.57,3523.62 3895.67,3523.62
  Mid-Layer 2 w7: 3895.67,3523.62 4129.92,3523.62 v3(4159.45,3553.15)
GND: C1.A.1 C1.B.1 C1.C.1 C1.D.1 C2.A.1 C2.B.1 C2.C.1 C2.D.1 C3.A.1 C3.B.1 C3.C.1 C3.D.1 C4.A.1 C4.B.1 C4.C.1 C4.D.1 C5.A.1 C5.B.1 C5.C.1 C5.D.1 C6.A.1 C6.B.1 C6.C.1 C6.D.1 C7.2 C8.2 C9.A.1 C9.B.1 C9.C.1 C9.D.1 C10.A.1 C10.B.1 C10.C.1 C10.D.1 C11.1 C12.A.1 C12.B.1 C12.C.1 C12.D.1 C13.1 C14.1 C15.2 C16.1 C17.2 C18.2 C19.2 C20.2 C21.1 C22.2 C23.2 C24.2 C25.2 C26.2 C27.2 C28.1 C29.2 C33.1 C34.1 C35.1 C36.1 C42.1 C43.1 C44.1 C45.1 C46.1 C47.1 C48.1 C50.1 C51.1 C52.1 C53.1 C56.2 C57.2 C58.2 C59.A.1 C59.B.1 C59.C.1 C59.D.1 C60.A.1 C60.B.1 C60.C.1 C60.D.1 C61.A.1 C61.B.1 C61.C.1 C61.D.1 C62.A.1 C62.B.1 C62.C.1 C62.D.1 C63.1 C64.1 DS1.A.2 DS1.B.2 DS1.C.2 DS1.D.2 DS2.2 DS3.2 DS4.2 DS5.2 DS6.2 IO1.1 IO1.4 IO1.7 IO1.P4 IO1.P5 IO1.P6 IO1.P10 IO1.P12 JP1.1 JP1.3 JP1.5 JP1.7 JP1.9 JP1.11 JP1.13 O1.2 O2.3 O2.4 O2.5 O2.8 O3.2 O3.4 O3.5 O3.8 O4.3 O4.4 O4.5 O4.8 O5.2 O5.4 O5.5 O5.8 P1.A.5 P1.A.6 P1.B.5 P1.B.6 P1.C.5 P1.C.6 P1.D.5 P1.D.6 P2.1 P2.4 P2.5 P2.7 P2.9 P2.11 P2.13 R4.A.2 R4.B.2 R4.C.2 R4.D.2 R5.A.2 R5.B.2 R5.C.2 R5.D.2 R7.A.1 R7.B.1 R7.C.1 R7.D.1 R10.1 R15.2 R34.A.2 R34.B.2 R34.C.2 R34.D.2 U1.A.A10 U1.A.B11 U1.A.B16 U1.A.F11 U1.A.G7 U1.A.G8 U1.A.G9 U1.A.G10 U1.A.G11 U1.A.H7 U1.A.H8 U1.A.H9 U1.A.H10 U1.A.H11 U1.A.J7 U1.A.J8 U1.A.J9 U1.A.J10 U1.A.J11 U1.A.K7 U1.A.K8 U1.A.K9 U1.A.K10 U1.A.K11 U1.A.L7 U1.A.L8 U1.A.L9 U1.A.L10 U1.A.L11 U1.A.M9 U1.A.T16 U1.B.A10 U1.B.B11 U1.B.B16 U1.B.F11 U1.B.G7 U1.B.G8 U1.B.G9 U1.B.G10 U1.B.G11 U1.B.H7 U1.B.H8 U1.B.H9 U1.B.H10 U1.B.H11 U1.B.J7 U1.B.J8 U1.B.J9 U1.B.J10 U1.B.J11 U1.B.K7 U1.B.K8 U1.B.K9 U1.B.K10 U1.B.K11 U1.B.L7 U1.B.L8 U1.B.L9 U1.B.L10 U1.B.L11 U1.B.M9 U1.B.T16 U1.C.A10 U1.C.B11 U1.C.B16 U1.C.F11 U1.C.G7 U1.C.G8 U1.C.G9 U1.C.G10 U1.C.G11 U1.C.H7 U1.C.H8 U1.C.H9 U1.C.H10 U1.C.H11 U1.C.J7 U1.C.J8 U1.C.J9 U1.C.J10 U1.C.J11 U1.C.K7 U1.C.K8 U1.C.K9 U1.C.K10 U1.C.K11 U1.C.L7 U1.C.L8 U1.C.L9 U1.C.L10 U1.C.L11 U1.C.M9 U1.C.T16 U1.D.A10 U1.D.B11 U1.D.B16 U1.D.F11 U1.D.G7 U1.D.G8 U1.D.G9 U1.D.G10 U1.D.G11 U1.D.H7 U1.D.H8 U1.D.H9 U1.D.H10 U1.D.H11 U1.D.J7 U1.D.J8 U1.D.J9 U1.D.J10 U1.D.J11 U1.D.K7 U1.D.K8 U1.D.K9 U1.D.K10 U1.D.K11 U1.D.L7 U1.D.L8 U1.D.L9 U1.D.L10 U1.D.L11 U1.D.M9 U1.D.T16 U2.A.6 U2.A.12 U2.A.28 U2.A.41 U2.A.46 U2.A.52 U2.A.54 U2.B.6 U2.B.12 U2.B.28 U2.B.41 U2.B.46 U2.B.52 U2.B.54 U2.C.6 U2.C.12 U2.C.28 U2.C.41 U2.C.46 U2.C.52 U2.C.54 U2.D.6 U2.D.12 U2.D.28 U2.D.41 U2.D.46 U2.D.52 U2.D.54 U3.A1 U3.A16 U3.B2 U3.B9 U3.B15 U3.F6 U3.F11 U3.G7 U3.G8 U3.G9 U3.G10 U3.H2 U3.H7 U3.H8 U3.H9 U3.H10 U3.J7 U3.J8 U3.J9 U3.J10 U3.J15 U3.K7 U3.K8 U3.K9 U3.K10 U3.L6 U3.L11 U3.R2 U3.R8 U3.R15 U3.T1 U3.T16 U4.1 U4.10 U4.19 U5.1 U5.12 U5.13 U5.14 U5.20 U5.22 U6.1 U7.3 U8.3 U9.4 U9.17 U9.25 U10.4 | length 14688.2
  Top Layer w7: R10.1@2547.24,3935.04 v3@2547.24,3983.27 ; R10.1@2549.21,3913.39 R10.1@2549.21,3948.82 ; v3(2584.65,4996.06) 2592.52,4988.19 U4.1@2592.52,4962.6 ; v3(2594.49,4728.35) U4.10@2594.49,4773.62 ; v3(2620.08,3568.9) 2644.68,3544.29 U5.14@2681.1,3544.29 ; v3@2621.06,3569.88 U5.13@2681.1,3569.88 ; v3(2627.95,3875.98) U5.1@2683.07,3875.98 ; U5.12@2681.1,3595.47 v3(2739.17,3595.47) ; U4.19@2694.88,4937.01 2718.5,4937.01 v3(2732.28,4950.79) ; DS1.A.2@2746.06,4635.83 v2(2746.06,4710.63) ; v3(2785.43,4204.72) DS5.2@2785.43,4259.84 ; U1.A.B16@2992.13,4448.82 v1(3019.68,4476.38) ; U1.A.T16@2992.13,5000 v1(3021.65,4970.47) ; R34.A.2@3145.67,3970.47 3145.67,3940.94 3307.09,3779.53 v4(3356.3,3779.53) U3.H2@3375.98,3799.21 ; U1.A.B11@3188.98,4448.82 v1(3188.98,4484.25) ; v1(3188.98,4574.8) U1.A.F11@3188.98,4606.3 ; U1.A.L11@3188.98,4803.15 v1(3208.66,4783.46) ; U1.A.A10@3228.35,4409.45 3248.03,4429.13 v1(3248.03,4482.28) ; U1.A.L10@3228.35,4803.15 v1(3248.03,4783.46) U1.A.L9@3267.72,4803.15 ; U1.A.M9@3267.72,4842.52 v1(3267.72,4874.02) ; v4(3312.99,4098.43) U3.A1@3336.61,4074.8 ; v4(3316.93,3503.94) U3.T1@3336.61,3484.25 ; v4(3356.3,3503.94) U3.R2@3375.98,3523.62 ; v4(3356.3,4055.12) U3.B2@3375.98,4035.43 ; U2.A.46@3417.48,5341.5 3417.48,5293.15 v2(3425.2,5285.43) ; v4(3513.78,3661.42) U3.L6@3533.46,3681.1 ; v4(3513.78,3858.27) U3.F6@3533.46,3877.95 ; U3.R8@3612.2,3523.62 v4(3631.89,3503.94) ; v4@3630.94,3780.48 U3.J9@3651.58,3759.84 ; v4(3631.89,4015.75) U3.B9@3651.58,4035.43 ; U3.K10@3690.95,3720.47 v4(3710.63,3700.79) ; v4(3710.63,3858.27) U3.F11@3730.32,3877.95 ; U3.L11@3730.32,3681.1 v4(3750,3661.42) ; v2(3732.28,5870.08) R5.A.2@3769.68,5870.08 ; R4.A.2@3767.72,5566.93 v2(3807.09,5566.93) ; R7.A.1@3799.21,4679.13 v2(3799.21,4720.47) ; v3(3826.77,4401.57) 3958.66,4269.69 DS2.2@4000,4269.69 ; v4(3868.11,3543.31) U3.R15@3887.8,3523.62 ; v4(3868.11,3779.53) U3.J15@3887.8,3759.84 ; U3.B15@3887.8,4035.43 v4(3907.48,4055.12) ; U3.T16@3927.17,3484.25 v4(3946.85,3464.57) ; U3.A16@3927.17,4074.8 3938.98,4074.8 v4(3948.82,4084.65) ; DS1.B.2@3956.69,4641.73 v2(3956.69,4716.54) ; v3(4127.95,3133.86) 4141.73,3120.08 O1.2@4186.22,3120.08 ; U1.B.B16@4204.72,4448.82 v1(4232.28,4476.38) ; U1.B.T16@4204.72,5000 v1(4234.25,4970.47) ; R34.B.2@4387.8,4185.04 4387.8,4362.2 4381.89,4368.11 4381.89,4429.13 U1.B.B11@4401.57,4448.82 v1(4401.57,4484.25) ; v1(4401.57,4574.8) U1.B.F11@4401.57,4606.3 ; U1.B.L11@4401.57,4803.15 v1(4421.26,4783.46) ; U1.B.A10@4440.94,4409.45 4460.63,4429.13 v1(4460.63,4482.28) ; U1.B.L10@4440.94,4803.15 v1(4460.63,4783.46) U1.B.L9@4480.31,4803.15 ; U1.B.M9@4480.31,4842.52 v1(4480.31,4874.02) ; U2.B.46@4630.08,5341.5 4630.08,5293.15 v2(4637.8,5285.43) ; v2(4944.88,5870.08) R5.B.2@4982.28,5870.08 ; R4.B.2@4980.31,5566.93 v2(5019.69,5566.93) ; R7.B.1@5011.81,4679.13 v2(5011.81,4720.47) ; v3(5061.02,4139.76) 5183.07,4261.81 DS3.2@5208.66,4261.81 ; DS1.C.2@5169.29,4641.73 v2(5169.29,4716.54) ; U1.C.B16@5417.32,4448.82 v1(5444.88,4476.38) ; U1.C.T16@5417.32,5000 v1(5446.85,4970.47) ; R34.C.2@5588.58,4125.98 5594.49,4131.89 5594.49,4429.13 U1.C.B11@5614.17,4448.82 v1(5614.17,4484.25) ; v1(5614.17,4574.8) U1.C.F11@5614.17,4606.3 ; U1.C.L11@5614.17,4803.15 v1(5633.86,4783.46) ; DS6.2@5627.95,3562.99 5740.16,3562.99 5777.56,3525.59 ; U1.C.A10@5653.54,4409.45 5673.23,4429.13 v1(5673.23,4482.28) ; U1.C.L10@5653.54,4803.15 v1(5673.23,4783.46) U1.C.L9@5692.91,4803.15 ; U1.C.M9@5692.91,4842.52 v1(5692.91,4874.02) ; U2.C.46@5842.68,5341.5 5842.68,5293.15 v2(5850.39,5285.43) ; v2(6157.48,5870.08) R5.C.2@6194.88,5870.08 ; R4.C.2@6192.91,5566.93 v2(6232.28,5566.93) ; R7.C.1@6224.41,4679.13 v2(6224.41,4720.47) ; DS1.D.2@6381.89,4641.73 v2(6381.89,4716.54) ; v3(6429.13,4159.45) DS4.2@6429.13,4263.78 ; U1.D.B16@6629.92,4448.82 v1(6657.48,4476.38) ; U1.D.T16@6629.92,5000 v1(6659.45,4970.47) ; R34.D.2@6812.99,4133.86 6807.09,4139.76 6807.09,4429.13 U1.D.B11@6826.77,4448.82 v1(6826.77,4484.25) ; v1(6826.77,4574.8) U1.D.F11@6826.77,4606.3 ; U1.D.L11@6826.77,4803.15 v1(6846.46,4783.46) ; U1.D.A10@6866.14,4409.45 6885.83,4429.13 v1(6885.83,4482.28) ; U1.D.L10@6866.14,4803.15 v1(6885.83,4783.46) U1.D.L9@6905.51,4803.15 ; U1.D.M9@6905.51,4842.52 v1(6905.51,4874.02) ; U2.D.46@7055.28,5341.5 7055.28,5293.15 v2(7062.99,5285.43) ; v2(7370.08,5870.08) R5.D.2@7407.48,5870.08 ; R4.D.2@7405.51,5566.93 v2(7444.88,5566.93) ; R7.D.1@7437.01,4679.13 v2(7437.01,4720.47)
  Top Layer w9: U3.G7@3572.83,3838.58 v4(3592.52,3818.9)
  Top Layer w10: U9.17@4685.04,3112.2 v3(4685.04,3175.2) ; v3(4854.33,3251.97) U9.25@4919.29,3251.97 ; JP1.1@5124.02,3168.31 v3(5124.02,3230.32) ; JP1.3@5205.71,3157.48 v3(5205.71,3233.27) ; JP1.5@5281.5,3160.43 5281.5,3211.61 v3(5308.07,3238.19) ; JP1.7@5362.2,3159.45 v3(5362.2,3232.28) ; JP1.9@5439.96,3159.45 v3(5439.96,3233.27) ; JP1.11@5519.69,3160.43 v3(5519.69,3234.25) ; JP1.13@5598.43,3160.43 v3(5640.75,3160.43)
  Top Layer w12: U2.A.28@2850.55,5341.5 v2(2850.55,5394.45) ; U5.22@2936.02,3723.43 v3(3004.92,3723.43) ; U5.20@2948.82,3672.24 3008.86,3672.24 v3(3011.81,3675.2) ; U2.A.41@3260,5341.5 v2(3260,5395) ; v2(3320,5830) 3322.99,5827.01 U2.A.12@3322.99,5778.5 ; U2.A.6@3511.97,5778.5 v2(3511.97,5831.97) ; v2(3590,5400) 3606.46,5383.54 U2.A.52@3606.46,5341.5 ; U2.A.54@3669.45,5341.5 3691.5,5341.5 v2(3700,5350) ; C22.2@3881.89,4463.58 v7(3881.89,4509.84) ; U2.B.28@4063.15,5341.5 v2(4063.15,5394.45) ; U2.B.41@4472.6,5341.5 v2(4472.6,5395) ; v2(4532.6,5830) 4535.59,5827.01 U2.B.12@4535.59,5778.5 ; U2.B.6@4724.57,5778.5 v2(4724.57,5831.97) ; v2(4802.6,5400) 4819.06,5383.54 U2.B.52@4819.06,5341.5 ; U2.B.54@4882.05,5341.5 4904.09,5341.5 v2(4912.6,5350) ; C23.2@5084.65,4468.5 5112.2,4468.5 v7(5141.73,4498.03) ; U2.C.28@5275.75,5341.5 v2(5275.75,5394.45) ; U2.C.41@5685.2,5341.5 v2(5685.2,5395) ; v2(5745.2,5830) 5748.19,5827.01 U2.C.12@5748.19,5778.5 ; U2.C.6@5937.17,5778.5 v2(5937.17,5831.97) ; v2(6015.2,5400) 6031.65,5383.54 U2.C.52@6031.65,5341.5 ; U2.C.54@6094.65,5341.5 6116.69,5341.5 v2(6125.2,5350) ; C24.2@6287.4,4452.76 v7(6347.44,4452.76) ; U2.D.28@6488.35,5341.5 v2(6488.35,5394.45) ; U2.D.41@6897.8,5341.5 v2(6897.8,5395) ; R15.2@6929.13,3883.86 6944.88,3868.11 C56.2@7053.15,3868.11 ; v2(6957.8,5830) 6960.79,5827.01 U2.D.12@6960.79,5778.5 ; U2.D.6@7149.76,5778.5 v2(7149.76,5831.97) ; C25.2@7223.43,4178.15 7223.43,4168.31 v7(7256.89,4134.84) ; v2(7227.8,5400) 7244.25,5383.54 U2.D.52@7244.25,5341.5 ; U2.D.54@7307.24,5341.5 7329.29,5341.5 v2(7337.8,5350)
  Top Layer w16: IO1.1@2293.31,3874.02 v3(2356.3,3874.02) ; IO1.4@2297.24,4025 v3(2358.86,4025) ; IO1.7@2297.24,4175 v3(2362.4,4175) ; IO1.P10@2297.24,4875 v3(2371.06,4875) ; IO1.P4@2299.21,4574.8 v3(2374.02,4574.8) ; IO1.P5@2299.21,4624.02 v3(2370.08,4624.02) ; IO1.P6@2299.21,4677.17 v3(2370.08,4677.17) ; IO1.P12@2299.21,4974.41 v3(2374.02,4974.41) ; U9.4@4450.79,3409.45 v3(4509.84,3409.45) ; v3(5781.5,3466.54) 5781.5,3521.65 ; C56.2@7064.96,3846.46 v3@7141.73,3846.46 ; v3(7145.87,3842.32) v3(7287.2,3842.32)
  Top Layer w20: v6(2399.61,3228.35) U8.3@2503.94,3228.35 ; U8.3@2499.02,3229.33 v6@2632.87,3229.33 ; v6@2559.06,3329.72 v6(2562.01,3326.77) ; v6(2629.92,3228.35) U8.3@2706.69,3228.35 ; C29.2@2958.66,3136.81 v6(2958.66,3219.49) ; C29.2@2959.65,3149.61 v6(3048.23,3149.61) ; C27.2@2985.24,3346.46 v6@2985.24,3420.28 ; C63.1@3310.04,3231.3 v6(3367.13,3231.3) ; C16.1@5755.91,3322.83 v6(5755.91,3397.64) ; v6(5810.04,3141.73) 5869.09,3200.79 C8.2@5885.83,3200.79 ; C15.2@5885.83,3409.45 v6(5885.83,3494.09) ; v6(6173.23,3308.07) 6178.15,3303.15 U7.3@6226.38,3303.15 ; U7.3@6429.13,3303.15 6429.13,3224.41 v9(6458.66,3194.88) ; U7.3@6432.09,3299.21 6432.09,3380.91 v9@6464.57,3413.39
  Top Layer w25: C17.2@3053.15,4251.97 v8(3053.15,4316.93) ; v8(3687.01,4836.61) C18.2@3753.94,4836.61 ; C19.2@6336.61,4820.87 v8(6401.57,4820.87) ; C20.2@7417.32,4466.54 7417.32,4498.03 v8(7444.88,4525.59)
  Top Layer w30: U6.1@7381.89,3188.98 7375,3181.1 v3(7666.34,3177.17) C26.2@7587.6,3177.17
  Mid-Layer 1 w20: v6@5754.92,3398.62 v6(5755.91,3397.64) ; v6(5885.83,3494.09) v6@5892.72,3500.98 ; v6@6171.26,3308.07 v6(6173.23,3308.07)
  Bottom Layer w7: C13.1@2722.44,3631.89 2722.44,3618.11 2739.17,3601.38 v3(2739.17,3595.47) 2730.32,3586.61 ; v1(3019.68,4476.38) 3019.68,4537.46 C2.A.1@3049.15,4566.93 ; v1(3019.68,4673.23) 3027.5,4681.04 C4.A.1@3027.5,4714.57 ; C3.A.1@3183.13,4822.83 3183.13,4808.99 v1(3208.66,4783.46) ; C1.A.1@3271.65,4921.26 v1(3314.96,4921.26) ; v4(3395.67,3661.42) 3401.57,3667.32 C42.1@3444.88,3667.32 ; v4(3553.15,3976.38) 3557.09,3972.44 C43.1@3557.09,3937.01 ; C52.1@3785.43,3452.76 3828.74,3496.06 v4(3828.74,3503.94) 3814.96,3517.72 C45.1@3789.37,3517.72 ; v4(3907.48,3661.42) 3922.99,3661.42 C51.1@3945,3639.41 ; v1(4232.28,4476.38) 4232.28,4537.46 C2.B.1@4261.75,4566.93 ; v1(4232.28,4673.23) 4240.09,4681.04 C4.B.1@4240.09,4714.57 ; C3.B.1@4395.73,4822.83 4395.73,4808.99 v1(4421.26,4783.46) ; C1.B.1@4484.25,4921.26 v1(4527.56,4921.26) ; v1(5444.88,4476.38) 5444.88,4537.46 C2.C.1@5474.35,4566.93 ; v1(5444.88,4673.23) 5452.69,4681.04 C4.C.1@5452.69,4714.57 ; C3.C.1@5608.33,4822.83 5608.33,4808.99 v1(5633.86,4783.46) ; C1.C.1@5696.85,4921.26 v1(5740.16,4921.26) ; v1(6657.48,4476.38) 6657.48,4537.46 C2.D.1@6686.95,4566.93 ; v1(6657.48,4673.23) 6665.29,4681.04 C4.D.1@6665.29,4714.57 ; C3.D.1@6820.93,4822.83 6820.93,4808.99 v1(6846.46,4783.46) ; C1.D.1@6909.45,4921.26 v1(6952.76,4921.26) ; v3(7287.2,3842.32) 7338.45,3842.32 C57.2@7354.39,3858.27 ; O3.2@7850,4850 7903.87,4850 C58.2@7933.07,4820.8 ; O5.2@7856.3,3846.46 7876.05,3826.71 C7.2@7942.91,3826.71
  Bottom Layer w10: v1(6964.57,4783.46) 7005.91,4783.46 C10.D.1@7011.81,4777.56
  Bottom Layer w12: C14.1@2942.91,3675.2 v3(3011.81,3675.2) ; v2(3260,5395) 3274.41,5380.59 C61.A.1@3274.41,5340 ; C60.A.1@3305.59,5780 3305.59,5815.59 v2(3320,5830) ; v4(3356.3,3779.53) C48.1@3399.61,3779.53 ; C47.1@3421.26,3710.63 3421.26,3690.94 C42.1@3444.88,3667.32 ; v2(3511.97,5831.97) 3526.16,5817.78 C59.A.1@3526.16,5780 ; v4(3513.78,3661.42) 3537.4,3637.8 C53.1@3545.28,3637.8 ; v4@3553.15,3580.71 3587.44,3615 C33.1@3594.41,3615 ; C62.A.1@3573.84,5340 3573.84,5383.84 v2(3590,5400) ; C46.1@3627.95,3474.41 3627.95,3500 v4(3631.89,3503.94) ; v4(3631.89,3897.64) C44.1@3667.32,3897.64 ; C35.1@3714.57,3661.42 v4(3750,3661.42) C34.1@3750,3699.41 ; v4(3868.11,3779.53) 3910.12,3779.53 C50.1@3920,3789.41 ; v2(4472.6,5395) 4487.01,5380.59 C61.B.1@4487.01,5340 ; C60.B.1@4518.19,5780 4518.19,5815.59 v2(4532.6,5830) ; v2(4724.57,5831.97) 4738.76,5817.78 C59.B.1@4738.76,5780 ; C62.B.1@4786.44,5340 4786.44,5383.84 v2(4802.6,5400) ; v2(5685.2,5395) 5699.61,5380.59 C61.C.1@5699.61,5340 ; C60.C.1@5730.79,5780 5730.79,5815.59 v2(5745.2,5830) ; v2(5937.17,5831.97) 5951.35,5817.78 C59.C.1@5951.35,5780 ; C62.C.1@5999.04,5340 5999.04,5383.84 v2(6015.2,5400) ; v2(6897.8,5395) 6912.2,5380.59 C61.D.1@6912.2,5340 ; C60.D.1@6943.39,5780 6943.39,5815.59 v2(6957.8,5830) ; v2(7149.76,5831.97) 7163.95,5817.78 C59.D.1@7163.95,5780 ; C62.D.1@7211.64,5340 7211.64,5383.84 v2(7227.8,5400)
  Bottom Layer w14: v1(3188.98,4574.8) 3188.98,4553.15 C6.A.1@3214.57,4527.56 ; v1(3287.4,4665.35) 3301.18,4651.57 C12.A.1@3301.18,4616.14 ; v1(3326.77,4704.72) 3342.46,4720.41 C10.A.1@3366.14,4720.41 ; v1@3393.64,4925.26 C5.A.1@3393.64,4960.63 ; v1(3397.64,4921.26) 3423.17,4895.73 C9.A.1@3425.2,4895.73 ; v1(4401.57,4574.8) 4401.57,4553.15 C6.B.1@4427.17,4527.56 ; v1(4500,4665.35) 4513.78,4651.57 C12.B.1@4513.78,4616.14 ; v1(4539.37,4704.72) 4555.06,4720.41 C10.B.1@4578.74,4720.41 ; v1@4606.24,4925.26 C5.B.1@4606.24,4960.63 ; v1(4610.24,4921.26) 4635.76,4895.73 C9.B.1@4637.8,4895.73 ; v1(5614.17,4574.8) 5614.17,4553.15 C6.C.1@5639.76,4527.56 ; v1(5712.6,4665.35) 5726.38,4651.57 C12.C.1@5726.38,4616.14 ; v1(5751.97,4704.72) 5767.65,4720.41 C10.C.1@5791.34,4720.41 ; v1@5818.83,4925.26 C5.C.1@5818.83,4960.63 ; v1(5822.83,4921.26) 5848.36,4895.73 C9.C.1@5850.39,4895.73 ; v1(6826.77,4574.8) 6826.77,4553.15 C6.D.1@6852.36,4527.56 ; v1(6925.2,4665.35) 6938.98,4651.57 C12.D.1@6938.98,4616.14 ; v1@7031.43,4925.26 C5.D.1@7031.43,4960.63 ; v1(7035.43,4921.26) 7060.96,4895.73 C9.D.1@7062.99,4895.73
  Bottom Layer w16: v4(3513.78,3858.27) 3519.68,3864.17 C36.1@3551.18,3864.17
  Bottom Layer w20: v6(2562.01,3326.77) C64.1@2612.14,3326.77 ; v6(2630.91,3178.15) C28.1@2700.79,3178.15 ; C11.1@6236.22,3458.66 v6(6236.22,3516.73) ; C21.1@6344.49,3161.42 6374.02,3161.42 v6(6394.69,3140.75)
  other v1: 3208.66,4665.35 3248.03,4665.35 3326.77,4665.35 4421.26,4665.35 4460.63,4665.35 4539.37,4665.35 5633.86,4665.35 5673.23,4665.35 5751.97,4665.35 6846.46,4665.35 6885.83,4665.35 6964.57,4665.35 3208.66,4704.72 3248.03,4704.72 3287.4,4704.72 4421.26,4704.72 4460.63,4704.72 4500,4704.72 5633.86,4704.72 5673.23,4704.72 5712.6,4704.72 6846.46,4704.72 6885.83,4704.72 6925.2,4704.72 6964.57,4704.72 3208.66,4744.09 3248.03,4744.09 3287.4,4744.09 3326.77,4744.09 4421.26,4744.09 4460.63,4744.09 4500,4744.09 4539.37,4744.09 5633.86,4744.09 5673.23,4744.09 5712.6,4744.09 5751.97,4744.09 6846.46,4744.09 6885.83,4744.09 6925.2,4744.09 6964.57,4744.09 3287.4,4783.46 3326.77,4783.46 4500,4783.46 4539.37,4783.46 5712.6,4783.46 5751.97,4783.46 6925.2,4783.46
  other v3: 2548.23,3979.33
  other v4: 3553.15,3582.68 3592.52,3740.16 3631.89,3740.16 3671.26,3740.16 3592.52,3779.53 3631.89,3779.53 3631.89,3779.53 3671.26,3779.53 3631.89,3818.9 3671.26,3818.9
  other v6: 2985.24,3416.34
  other v9: 2419.29,3118.11 2496.06,3120.08 6535.43,3196.85 2421.26,3338.58 2498.03,3340.55 6460.63,3415.35 6537.4,3417.32
NetC7_1: C7.1 O5.3 R29.2 | length 355.8
  Top Layer w16: R29.2@7608.27,3724.41 7824.41,3724.41 O5.3@7850,3750
  Bottom Layer w7: O5.3@7850,3750 7875.53,3775.53 C7.1@7942.91,3775.53
NetC21_2: C21.2 U7.5 | length 109.6
  Top Layer w20: v6(6232.28,3159.45) U7.5@6232.28,3203.15
  Bottom Layer w20: v6@6227.36,3161.42 C21.2@6293.31,3161.42
NetC58_1: C58.1 O3.3 R25.2 | length 323
  Top Layer w16: R25.2@7620.08,4750 O3.3@7850,4750
  Bottom Layer w7: O3.3@7846.46,4753.94 7917.39,4753.94 C58.1@7933.07,4769.62
NetC64_2: C64.2 U8.5 | length 131.5
  Top Layer w20: U8.5@2700.79,3328.35 v6(2700.79,3376.97)
  Mid-Layer 1 w20: v6(2700.79,3376.97) v6@2705.71,3381.89
  Bottom Layer w20: C64.2@2663.32,3326.77 2687.01,3326.77 2703.74,3343.5 v6@2703.74,3372.05
NetDS1.A_1: DS1.A.1 R6.A.2 | length 100.4
  Top Layer w7: R6.A.2@2748.03,4470.47 DS1.A.1@2748.03,4570.87
NetDS1.B_1: DS1.B.1 R6.B.2 | length 100.4
  Top Layer w7: R6.B.2@3960.63,4470.47 DS1.B.1@3960.63,4570.87
NetDS1.C_1: DS1.C.1 R6.C.2 | length 100.4
  Top Layer w7: R6.C.2@5173.23,4470.47 DS1.C.1@5173.23,4570.87
NetDS1.D_1: DS1.D.1 R6.D.2 | length 100.4
  Top Layer w7: R6.D.2@6385.83,4470.47 DS1.D.1@6385.83,4570.87